# Altium PCB cycloonboard.PcbDoc
Units mil, origin at the board's own origin, x right, y up, seen from the top; angles counter-clockwise.
Board outline 3960 x 4000 mil, 2 copper layers (Top Layer, Bottom Layer), stack 61.756 mil thick; 43 components, 53 nets, 235 pads, 35 vias.
Unrouted connection lines stored in the file: 24.
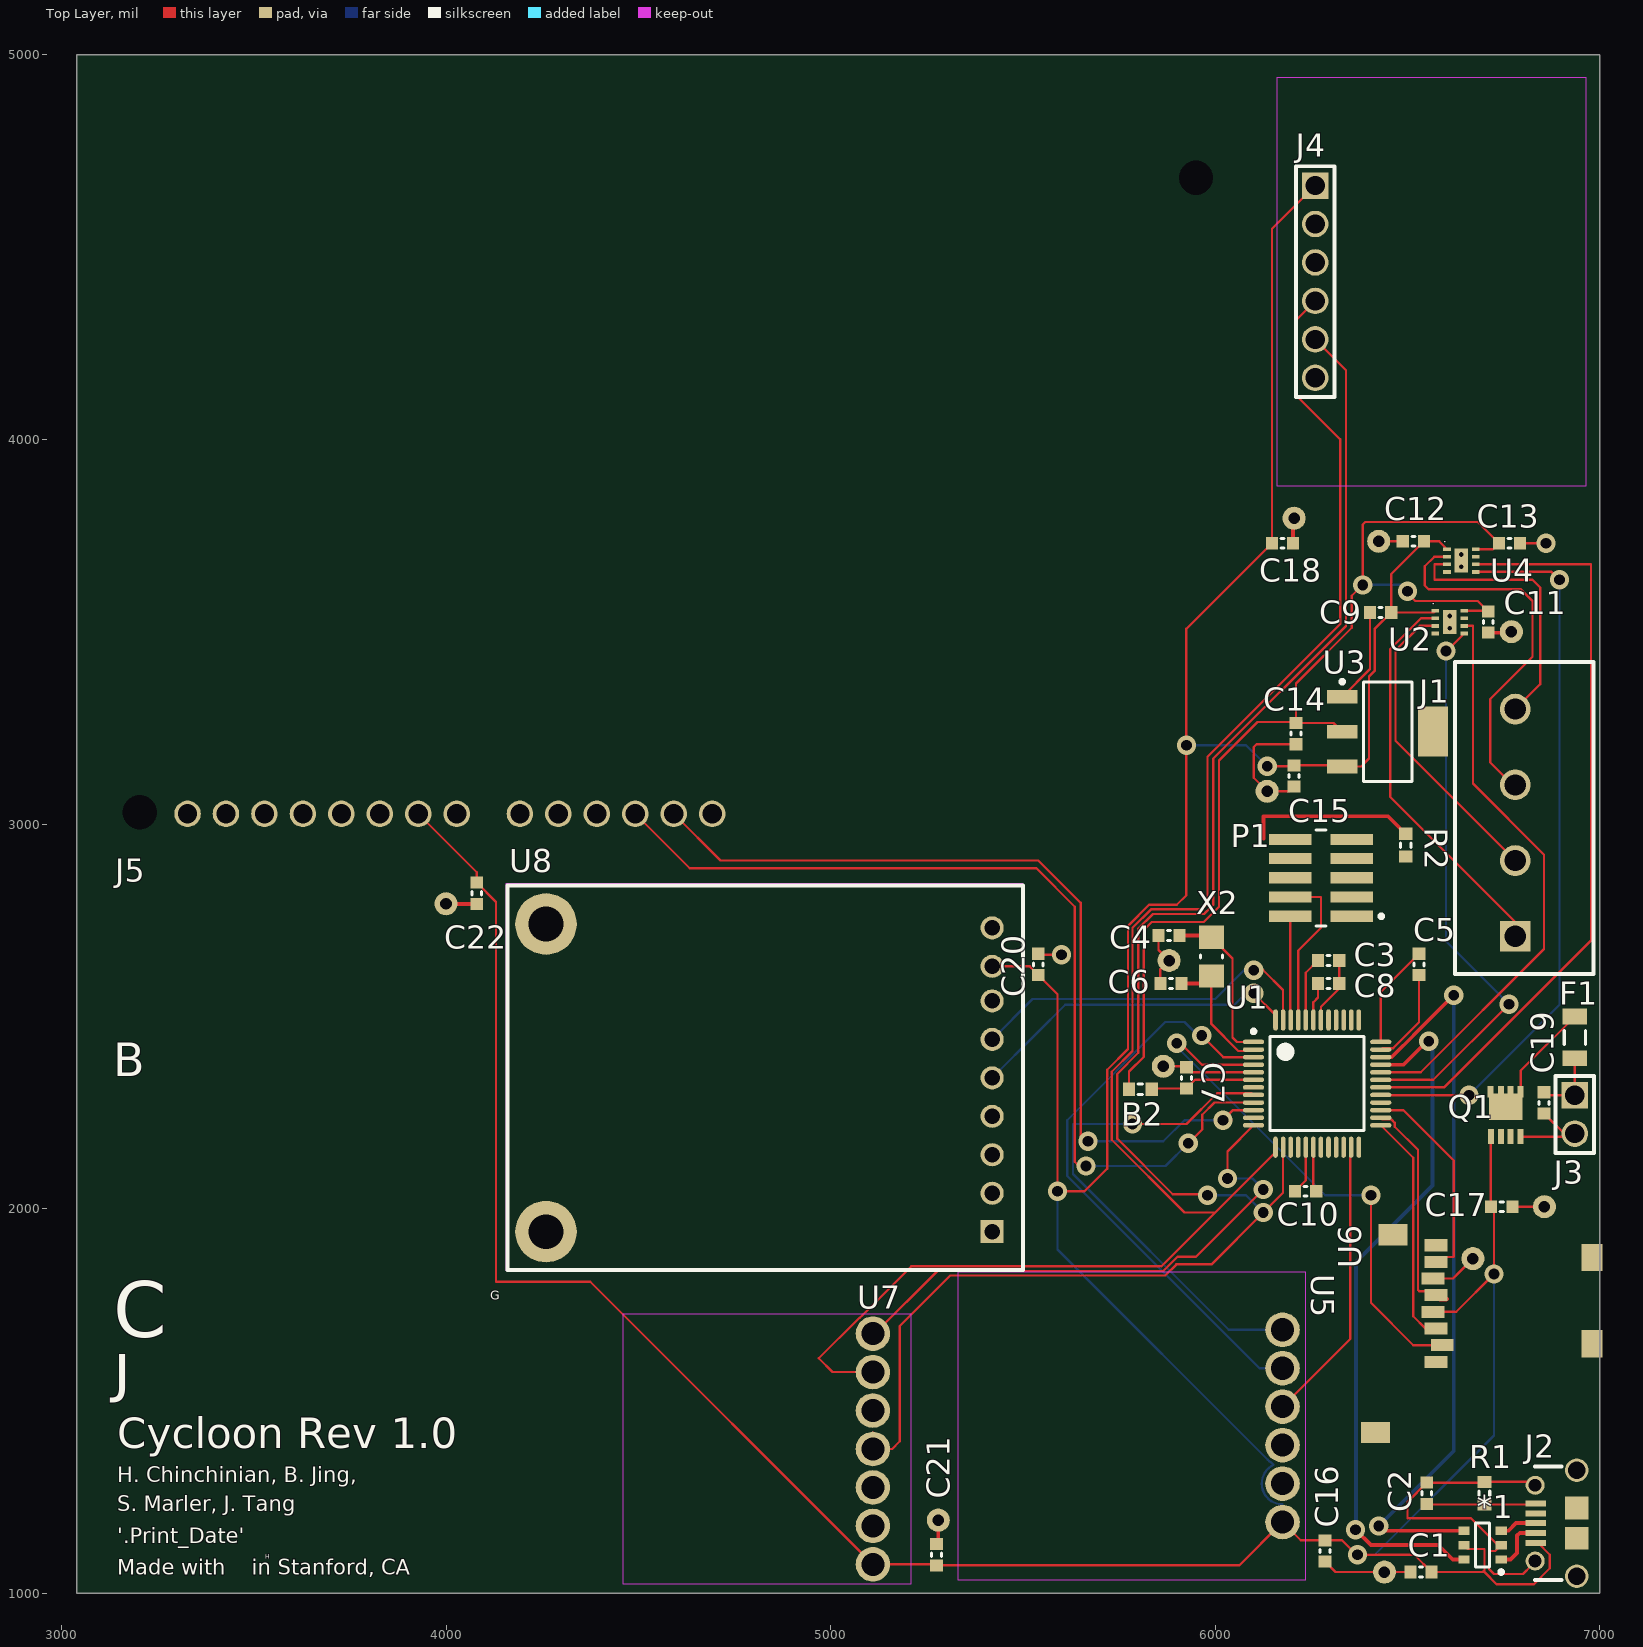
[diagram p0: Top Layer view]
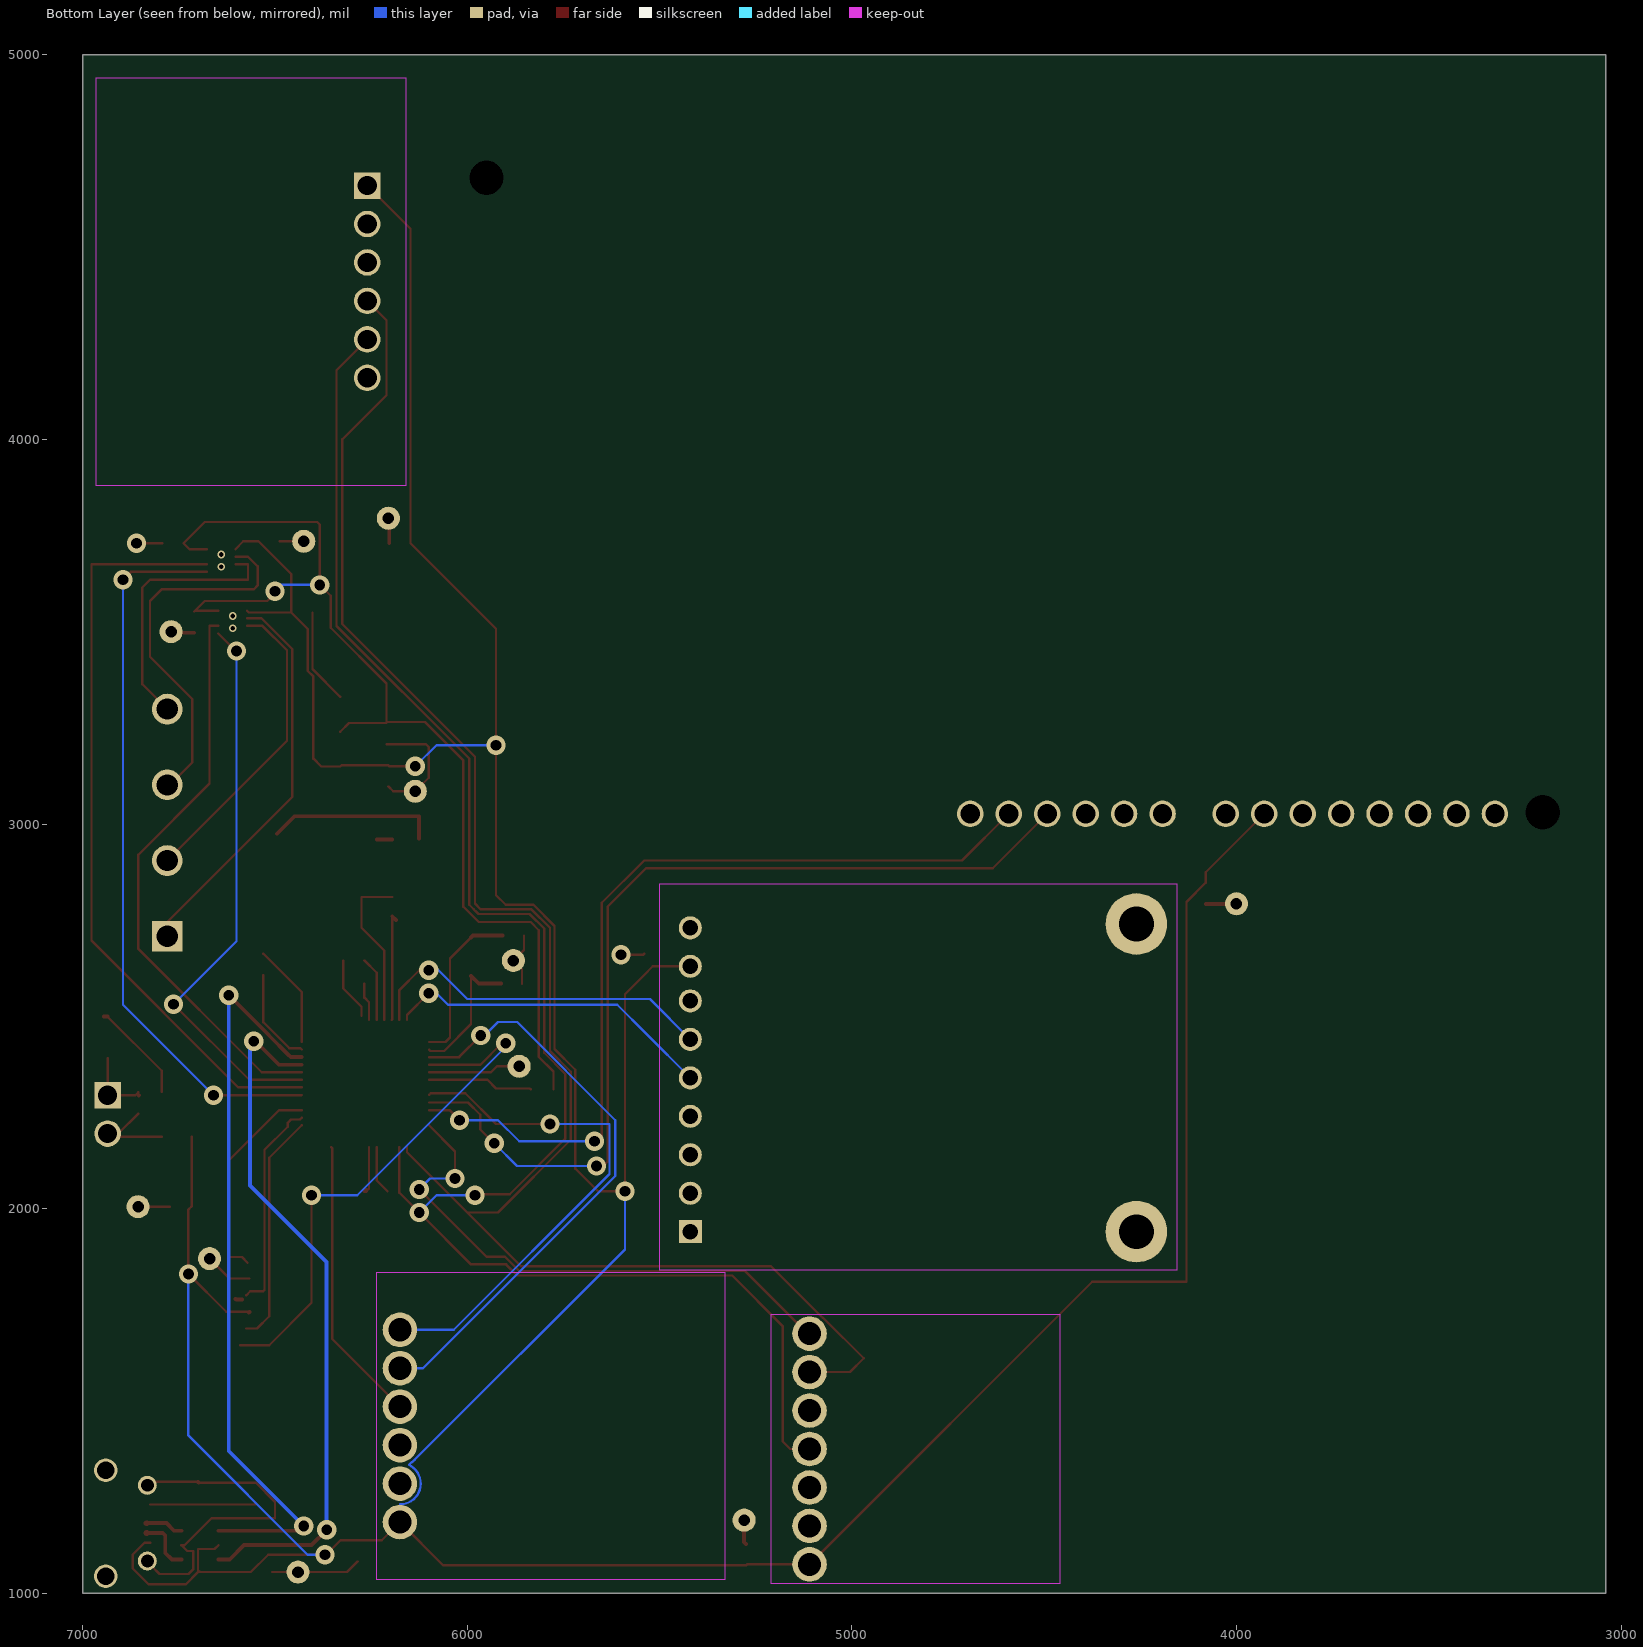
[diagram p1: Bottom Layer view, seen from below]
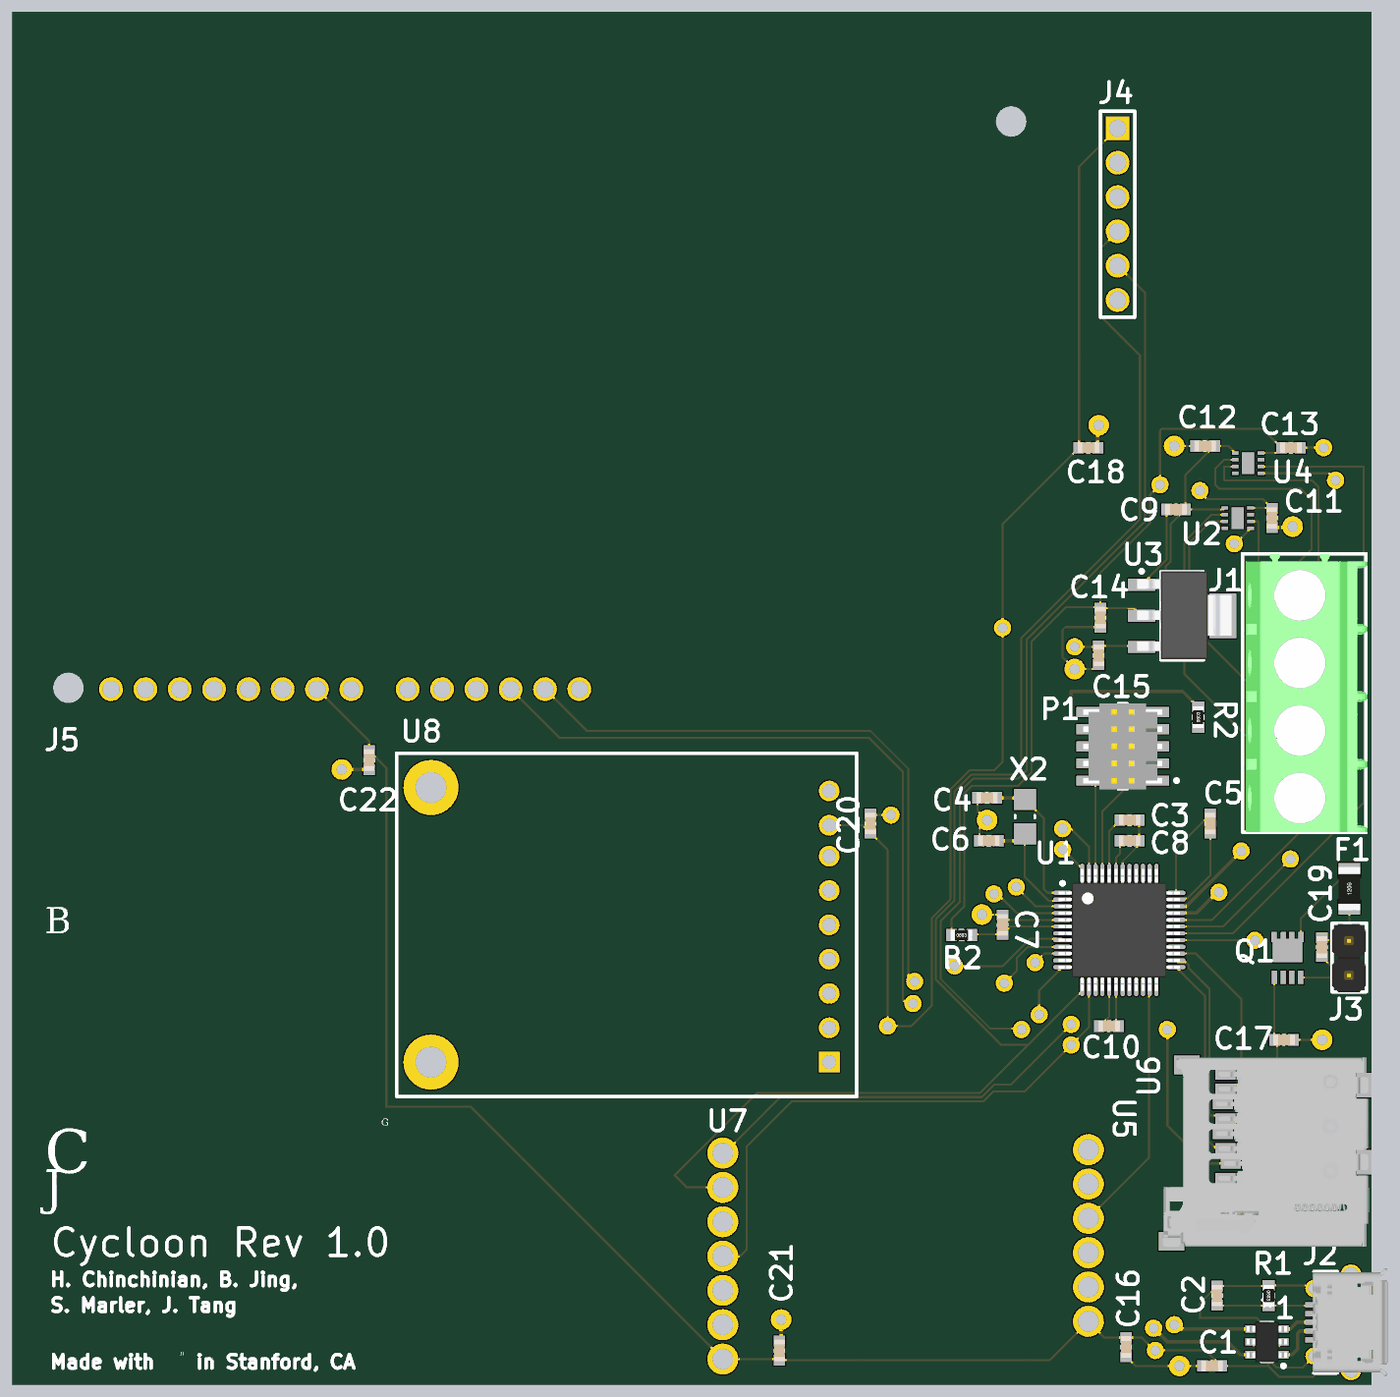
[diagram p2: 3D render of the assembled board from above, using the file's embedded part models]

## Layer stack, top to bottom
Top Solder: solder mask 1, SM-001, Dk 4
Top Layer: signal copper 1.378
Dielectric 1: core 59, Core-043, Dk 4.3
Bottom Layer: signal copper 1.378
Bottom Solder: solder mask 1, SM-001, Dk 4

## Board outline
3040,1000 7000,1000 7000,5000 3040,5000

## Design rules (kind name [scope] priority, off if disabled: settings)
AcuteAngle [All] p1: minimum=4.50000000000000E+0001 checktracksonly=FALSE
BoardOutlineClearance [All] p1: gap=20 ignorepadtopadclearanceinfootprint=FALSE except(0: Arc-SplitContinuation Track-SplitContinuation SMDPad-SplitContinuation THPad-SplitContinuation Via-SplitContinuation Fill-SplitContinuation Poly-SplitContinuation Region-SplitContinuation Text-SplitContinuation)
Clearance [All] p1: gap=6 ignorepadtopadclearanceinfootprint=TRUE except(0: Arc-Hole Track-Hole SMDPad-Hole THPad-Hole Via-Hole Fill-Hole Poly-Hole Region-Hole Text-Hole)
DiffPairsRouting [All] p1: maxlimit=10 minlimit=5 mostfreqgap=10 toplayer_minwidth=5 toplayer_maxwidth=15 toplayer_prefwidth=10 bottomlayer_minwidth=5 bottomlayer_maxwidth=15 bottomlayer_prefwidth=10 maxuncoupledlength=500
HoleSize [All] p1: absolutevalues=TRUE maxlimit=1000 minlimit=12 maxpercent=80.000 minpercent=20.000
MinimumAnnularRing [All] p1: minimumring=6
MinimumSolderMaskSliver [All] p1: minsoldermaskwidth=0
PolygonConnect [All] p1: connectstyle=Relief reliefconductorwidth=10 reliefentries=4 polygonreliefangle="90 Angle" airgapwidth=10
RoutingVias [All] p1: holewidth=12 width=24 viastyle="Through Hole" minholewidth=12 minwidth=24 maxholewidth=1000 maxwidth=1000
SilkToSilkClearance [All] p1: silktosilkclearance=0
SilkToSolderMaskClearance [IsPad] p1: minsilkscreentomaskgap=0 clearancetoexposedcopper=TRUE
SolderMaskExpansion [All] p1: expansion=4 istentingtop=FALSE
UnRoutedNet [All] p1: checkbadconnections=TRUE
Width [All] p1: maxlimit=1000 minlimit=6 preferedwidth=6 minimp=50.000000 maximp=50.000000 favimp=50.000000 checkconnectedcopper=TRUE
24 further rules are at their usual default settings.

## Classes and differential pairs
component class Topsheet: C9 C11 C12 C13 C14 C15 C16 C17 C18 C19 C20 C21 C22 F1 J1 J3 J4 J5 Q1 U2 U3 U4 U5 U6 U7
component class "Arduino Core": *1 B2 C1 C2 C3 C4 C5 C6 C7 C8 C10 J2 P1 R1 R2 U1 X2
differential pair USB: +USB_P -USB_N
differential pair USB_CON: +USB_CON_P -USB_CON_N

## Components (designator, comment, footprint, x,y, rotation, side; value= is the part's Value field where it differs from the comment)
*1 "USBLC6-2" 6SOT23 6695,1125 r180 top
B2 "FB_1608" R0603 5805.47,2310 r0 top
C1 "__template_cap" C0603 6535,1055 r180 top
C2 "__template_cap" C0603 6550,1260 r90 top
C3 "__template_cap" C0603 6295,2645 r180 top
C4 "__template_cap" C0603 5880,2710 r0 top
C5 "__template_cap" C0603 6530,2635 r90 top
C6 "__template_cap" C0603 5885,2585 r0 top
C7 "__template_cap" C0603 5925,2340 r270 top
C8 "__template_cap" C0603 6295,2585 r0 top
C9 "__template_cap" C0603 6430,3550 r180 top
C10 "__template_cap" C0603 6235,2045 r0 top
C11 "__template_cap" C0603 6710,3525 r270 top
C12 "__template_cap" C0603 6515,3735 r180 top
C13 "__template_cap" C0603 6765,3730 r0 top
C14 "__template_cap" C0603 6210,3235 r270 top
C15 "__template_cap" C0603 6205,3125 r270 top
C16 "__template_cap" C0603 6285,1110 r90 top
C17 "__template_cap" C0603 6745,2005 r180 top
C18 "__template_cap" C0603 6175,3730 r180 top
C19 "__template_cap" C0603 6855,2275 r90 top
C20 "__template_cap" C0603 5540,2635 r90 top
C21 "__template_cap" C0603 5275,1100 r270 top
C22 "__template_cap" C0603 4080,2820 r270 top
F1 "__template_fuse" R1206 6935,2445 r90 top
J1 "CONN 1x4 Screw Terminal" CONN_1x4_5mm 6970.94,2609.72 r180 top
J2 "CONN_USB_MICROB_SMD_TH_R/A" CONN_USBMICROB_10118194-0001LF 6940,1182.2 r90 top
J3 "CONN HEADER 2POS VERT T/H" CONN_1x2_100MIL 6935,2295 r0 top
J4 "CONN HEADER 6POS T/H" CONN_1x6_100MIL 6260,4660 r0 top
J5 "ROCKBLOCK_V2" ROCKBLOCK_V2 3107.48,2931.97 r270 top
P1 "FTSH-105-01-F-DV-K" SMTC-FTSH-105-01-L-DV-K_V 6275.12,2860 r90 top
Q1 "Si7615" POWERPAK_1212-8_SINGLE 6755,2231.04 r90 top
R1 "__template_resistor" R0603 6700,1260 r270 top
R2 "__template_resistor" R0603 6495,2945 r90 top
U1 "SAMD21G18A-A" "SAMD21 TQFP-48" 6265,2325 r0 top
U2 "DRV8837CDSGT" 8WSON 6572.6,3515.16 r270 top
U3 "LDO_LD1117S33CTR" 4SOT223 6448.11,3240 r0 top
U4 "DRV8837CDSGT" 8WSON 6602.6,3675.16 r270 top
U5 "MAX31855" ADAFRUIT_THERMOCOUPLE_BREAKOUT 6175,1385 r180 top
U6 "uSD Card" MICROSD_CARD_SOCKET 6424.65,1953.66 r90 top
U7 "BMP280" ADAFRUIT_BMP280_BREAKOUT 5110,1375 r180 top
U8 "Adafruit GPS Module" adafruit_gps_746 5500,1840 r90 top
X2 "XTAL_9HT10-32.768KEZF-T" XTAL_TXC_9HT10 5990,2655 r90 top

## Footprints (in the part's own frame and the unit in brackets; to place one, negate y for a bottom-side part, rotate by r counter-clockwise, add the part's x,y. Pads: shape width x height; smd on the part's side, far side on the other; paste and mask are expansions set on the pad)
4SOT223 [mm] "SOT223, 4-Leads, Body 6.6x7.1mm (max), Pitch 2.30mm, IPC Medium Density"
  rect 2x0.9 smd: 1(-3,2.3) 2(-3,0) 3(-3,-2.3)
  rect 2x3.3 smd: 4(3,0)
  silkscreen extent -3.12,-3.27 1.6,3.42, body extent -3.34,-3.2 3.66,3.3, height 1.59
6SOT23 [mm] "SOT23, 6-Leads, Body 2.9x2.8mm (max), Pitch 0.95mm, IPC High Density"
  rect 0.75x0.55 smd: 1(-1.225,0.95) 2(-1.225,0) 3(-1.225,-0.95) 4(1.225,-0.95) 5(1.225,0) 6(1.225,0.95)
  silkscreen extent -1.35,-1.45 0.45,1.9, body extent -1.5,-1.5 1.5,1.5, height 1.46
8WSON [mm]
  rect 0.25x0.5 smd: 1(-1,0) 2(-0.5,0) 3(0,0) 4(0.5,0) 5(0.5,1.9) 6(0,1.9) 7(-0.5,1.9) 8(-1,1.9)
  rect 1.6x0.9 smd: PAD(-0.25,0.95)
ADAFRUIT_BMP280_BREAKOUT [mil]
  round 90 hole 60: 0(0,300) 1(0,200) 2(0,100) 3(0,0) 4(0,-100) 5(0,-200) 6(0,-300)
adafruit_gps_746 [mil]
  round 160 hole 90: 1(100,1240)
  rect 60x60 hole 40: 1(100,80)
  round 160 hole 90 paste+0: 1(900,1240)
  round 60 hole 40: 2(200,80) 3(300,80) 4(400,80) 5(500,80) 6(600,80) 7(700,80) 8(790,80)
  round 60 hole 40 paste+0: 9(890,80)
  silkscreen extent 0,0 1000,1340
ADAFRUIT_THERMOCOUPLE_BREAKOUT [mil]
  round 90 hole 60: 0(0,200) 1(0,100) 2(0,0) 3(0,-100) 4(0,-200) 5(0,-300)
C0603 [mm] "Chip Capacitor, 2-Leads, Body 1.6x0.8mm, IPC High Density"
  rect 0.8x0.85 smd: 1(-0.7,0) 2(0.7,0)
  silkscreen extent -0.1,-0.33 0.1,0.33, body extent -0.8,-0.4 0.8,0.4, height 0.8
CONN_1x2_100MIL [mm]
  rect 1.75x1.75 hole 1.27: 1(0,0)
  round 1.75 hole 1.27: 2(0,-2.54)
  silkscreen extent -1.27,-3.81 1.27,1.27, body extent -1.3,-3.86 1.24,1.22, height 8.5
CONN_1x4_5mm [mil]
  rect 80x80 hole 55: 1(190.94,-98.42)
  round 80 hole 55: 2(190.94,-295.28) 3(190.94,-492.13) 4(190.94,-688.98)
  silkscreen extent -13,-811 347,0, body extent -17,-811 337,-1, height 449
CONN_1x6_100MIL [mm]
  rect 1.75x1.75 hole 1.27: 1(0,0)
  round 1.75 hole 1.27: 2(0,-2.54) 3(0,-5.08) 4(0,-7.62) 5(0,-10.16) 6(0,-12.7)
  silkscreen extent -1.27,-13.97 1.27,1.27, body extent -1.27,-13.97 1.27,1.27, height 2.54
CONN_USBMICROB_10118194-0001LF [mm]
  rect 0.4x1.35 smd: 1(-1.3,2.7) 2(-0.65,2.7) 3(0,2.7) 4(0.65,2.7) 5(1.3,2.7)
  round 1.55 hole 1.15: SHIELD(-3.5,0) SHIELD(3.5,0)
  round 1.25 hole 0.85: SHIELD(-2.5,2.75) SHIELD(2.5,2.75)
  rect 1.5x1.55 smd: SHIELD(-1,0) SHIELD(1,0)
  silkscreen extent -3.75,1.02 3.75,2.75, body extent -4.02,-2.7 6.75,2.88, height 5.83
MICROSD_CARD_SOCKET [mm]
  rect 0.8x1.5 smd: 1(-8.94,-3.8) 2(-7.84,-4.2) 3(-6.74,-3.8) 4(-5.64,-3.6) 5(-4.54,-3.8) 6(-3.44,-3.6) 7(-2.34,-3.8) 8(-1.24,-3.8)
  rect 1.4x1.9 smd: CD(-13.6,0.2) SHIELD3(-0.55,-0.95)
  rect 1.8x1.4 smd: SHIELD1(-2.05,-14.1) SHIELD2(-7.75,-14.1)
  body extent -14,-14.43 0,0.83, height 1.85
POWERPAK_1212-8_SINGLE [mm] "PowerPAK 1212-8 Single (Vishay footprint)"
  rect 0.99x0.405 smd: 1(-1.12,-0.315) 1(-1.12,0.315) 1(-1.12,0.975) 4(-1.12,-0.975)
  rect 1.725x2.204 smd: 5(0.863,0)
  rect 0.76x0.405 smd: 5(1.855,-0.992) 5(1.855,-0.315) 5(1.855,0.315) 5(1.855,0.992)
  Mechanical 13 keep-out region: -0.168,-1.775 0.167,-1.775 0.167,1.775 -0.168,1.775
  body extent -1.5,-1.25 2,1.25, height 1.05
R0603 [mm] "Chip Resistor, 2-Leads, Body 1.6x0.8mm, IPC High Density"
  rect 0.8x0.9 smd: 1(-0.75,0) 2(0.75,0)
  silkscreen extent -0.15,-0.35 0.15,0.35, body extent -0.8,-0.4 0.8,0.4, height 0.45
R1206 [mm] "Chip Resistor, 2-Leads, Body 3.1x1.6mm, IPC High Density"
  rect 1.05x1.6 smd: 1(-1.375,0) 2(1.375,0)
  silkscreen extent -0.45,-0.7 0.45,0.7, body extent -1.6,-0.8 1.6,0.8, height 0.6
ROCKBLOCK_V2 [mm] "Header for RockBlock V2"
  round 1.75 hole 1.27: 1(-2.4,40.25) 2(-2.4,37.71) 3(-2.4,35.17) 4(-2.4,32.63) 5(-2.4,30.09) 6(-2.4,27.55) 7(-2.4,23.38) 8(-2.4,20.84) 9(-2.4,18.3) 10(-2.4,15.76) 11(-2.4,13.22) 12(-2.4,10.68) 13(-2.4,8.14) 14(-2.4,5.6)
  round 0 hole 2.261 unplated: HOLE(-44.4,72.2) HOLE(-2.5,2.45)
"SAMD21 TQFP-48" [mm] "TQFP-48, Body 7.00x7.00mm, Pitch 0.50mm, IPC Medium Density"
  oval 1.4x0.3 smd: 1(-4.2,2.75) 2(-4.2,2.25) 3(-4.2,1.75) 4(-4.2,1.25) 5(-4.2,0.75) 6(-4.2,0.25) 7(-4.2,-0.25) 8(-4.2,-0.75) 9(-4.2,-1.25) 10(-4.2,-1.75) 11(-4.2,-2.25) 12(-4.2,-2.75) 25(4.2,-2.75) 26(4.2,-2.25) 27(4.2,-1.75) 28(4.2,-1.25) 29(4.2,-0.75) 30(4.2,-0.25) 31(4.2,0.25) 32(4.2,0.75) 33(4.2,1.25) 34(4.2,1.75) 35(4.2,2.25) 36(4.2,2.75)
  oval 0.3x1.4 smd: 13(-2.75,-4.2) 14(-2.25,-4.2) 15(-1.75,-4.2) 16(-1.25,-4.2) 17(-0.75,-4.2) 18(-0.25,-4.2) 19(0.25,-4.2) 20(0.75,-4.2) 21(1.25,-4.2) 22(1.75,-4.2) 23(2.25,-4.2) 24(2.75,-4.2) 37(2.75,4.2) 38(2.25,4.2) 39(1.75,4.2) 40(1.25,4.2) 41(0.75,4.2) 42(0.25,4.2) 43(-0.25,4.2) 44(-0.75,4.2) 45(-1.25,4.2) 46(-1.75,4.2) 47(-2.25,4.2) 48(-2.75,4.2)
  silkscreen extent -4.32,-3.1 3.1,3.57, body extent -4.5,-4.5 4.5,4.5, height 1.2
SMTC-FTSH-105-01-L-DV-K_V [mm] "CONN, 10-Leads, Body 6.35x3.43mm, Pitch 1.27mm"
  rect 0.74x2.79 smd: 1(-2.54,-2.035) 2(-2.54,2.035) 3(-1.27,-2.035) 4(-1.27,2.035) 5(0,-2.035) 6(0,2.035) 7(1.27,-2.035) 8(1.27,2.035) 9(2.54,-2.035) 10(2.54,2.035)
  silkscreen extent -3.17,-4.11 3.17,0.34, body extent -3.17,-2.92 3.18,2.92, height 6.12
XTAL_TXC_9HT10 [mm] "Chip Capacitor, 2-Leads, Body 3.2x1.5mm, IPC Medium Density"
  rect 1.55x1.65 smd: 1(-1.275,0) 2(1.275,0)
  silkscreen extent -0.1,-0.72 0.1,0.72, body extent -1.65,-0.8 1.65,0.8, height 0.85

## Part data
*1: Capacitance @ Frequency=-, Current - Peak Pulse (10/1000µs)="5A (8/20µs)", Manufacturer=STMicroelectronics, Manufacturer Part Number=USBLC6-2SC6, Operating Temperature="-40°C ~ 125°C (TJ)", Package / Case=SOT-23-6, Power Line Protection=Yes, Supplier Part Number 1=497-5235-1-ND, Voltage - Breakdown (Min)=6V, Voltage - Clamping (Max) @ Ipp=17V, Voltage - Reverse Standoff (Typ)=5.25V, Applications=Ethernet, Bidirectional Channels=-, Category="Circuit Protection", ComponentLink1Description=http://www.st.com/web/en/resource/technical/document/datasheet/CD00050750.pdf, ComponentLink1URL=http://www.st.com/web/en/resource/technical/document/datasheet/CD00050750.pdf, Mounting Type="Surface Mount", Packaging="Cut Tape (CT)", Part Status=Active, Power - Peak Pulse=-, Pricing 1="1=0.51, 10=0.411, 100=0.2802, 500=0.21012, 1000=0.15759 (USD)", RoHS="RoHS Compliant", Stock 1=31719, Supplier 1=Digi-Key, Supplier Device Package=SOT-23-6, Type="Steering (Rail to Rail)", Unidirectional Channels=2
B2: "FERRITE BEAD 600 OHM 300mA", Current Rating (Max)=300mA, DC Resistance (DCR) (Max)="400 mOhm", Impedance @ Frequency="600 Ohm @ 100MHz", Manufacturer="Taiyo Yuden", Manufacturer Part Number=BK1608HW601-T, Operating Temperature="-55°C ~ 125°C", Package / Case="0603 (1608 Metric)", Ratings=-, Supplier Part Number 1=587-1879-1-ND, Category=Filters, ComponentLink1Description=http://ds.yuden.co.jp/TYCOMPAS/ut/detail.do?productNo=BK1608HW601-T&fileName=BK1608HW601-T_SS&mode=specSheetDownload, ComponentLink1URL=http://ds.yuden.co.jp/TYCOMPAS/ut/detail.do?productNo=BK1608HW601-T&fileName=BK1608HW601-T_SS&mode=specSheetDownload, Filter Type=-, Height (Max)="0.037\" (0.95mm)", Mounting Type="Surface Mount", Number of Lines=1, Packaging="Cut Tape (CT)", Part Status=Active, Pricing 1="1=0.1, 10=0.059, 50=0.0474, 100=0.0426, 250=0.0312, 500=0.0227, 1000=0.02223 (USD)", RoHS="RoHS Compliant", Size / Dimension="0.063\" L x 0.031\" W (1.60mm x 0.80mm)", Stock 1=11908, Supplier 1=Digi-Key
C1 C3 C5 C7 C10: library part 490-1519-1-ND, "CAP CER 0603 0.1µF X7R 50V 10%", Capacitance (shorthand)=0.1µF, Capacitance - pF (Machine readable)=#NAME?, Dielectric=X7R, Manufacturer="Murata Electronics North America", Rated Voltage=50V, Supplier 1=Digikey, Supplier Part Number 1=490-1519-1-ND, Type=capacitor
C2: library part 490-1506-1-ND, "CAP CER 0603 4700pF X7R 50V 10%", Capacitance (shorthand)=4700pF, Capacitance - pF (Machine readable)=#NAME?, Dielectric=X7R, Manufacturer="Murata Electronics North America", Rated Voltage=50V, Supplier 1=Digikey, Supplier Part Number 1=490-1506-1-ND, Type=capacitor
C4 C6: library part 490-1407-1-ND, "CAP CER 15PF 50V C0G/NP0 0603", Capacitance (shorthand)=15pF, Capacitance - pF (Machine readable)=15, Dielectric="C0G, NP0", Manufacturer="Murata Electronics North America", Rated Voltage=50V, Supplier 1=Digikey, Supplier Part Number 1=490-1407-1-ND, Type=capacitor
C8: library part 490-3900-1-ND, "CAP CER 0603 1µF X7R 16V 10%", Capacitance (shorthand)=1µF, Capacitance - pF (Machine readable)=#NAME?, Dielectric=X7R, Manufacturer="Murata Electronics North America", Rated Voltage=16V, Supplier 1=Digikey, Supplier Part Number 1=490-3900-1-ND, Type=capacitor
C9 C11 C12 C13 C14 C15: library part 490-13248-1-ND, "CAP CER 10UF 35V X5R 0603 20%", Capacitance (shorthand)=10µF, Capacitance - pF (Machine readable)=#NAME?, Dielectric=X5R, Manufacturer="Murata Electronics North America", Rated Voltage=35V, Supplier 1=Digikey, Supplier Part Number 1=490-13248-1-ND, Type=capacitor
F1: library part CMP-035-0003-1, Design Item ID=__template_fuse, Source=fuse.SchLib
J1: library part CONN_1x4_PhoenixContact_1935187, "CONN 1x4 Screw Terminal: Phoenix Contact 1935187", Supplier Part Number 1=277-1579-ND, ComponentLink1Description="Digikey part", ComponentLink1URL=https://www.digikey.com/product-detail/en/phoenix-contact/1935187/277-1579-ND/568616, Supplier 1=Digi-Key
J2: "CONN RCPT USB2.0 MICRO B SMD R/A", Colour=Black, Current Rating=1.8A, Flammability Rating="UL94 V-0", Insulation Resistance=1GR, Manufacturer="Amphenol FCI", Manufacturer Part Number=10118194-0001LF, Max Operating Temperature=85°C, Max Voltage Rating (AC)=100V, Min Operating Temperature=-55°C, Package Quantity=9600, Supplier Part Number 1=609-4618-1-ND, ComponentLink1Description=https://datasheet.ciiva.com/851/10118194-851110.pdf, ComponentLink1URL=https://datasheet.ciiva.com/851/10118194-851110.pdf, ComponentLink2Description=https://datasheet.ciiva.com/851/10118194-851111.pdf, ComponentLink2URL=https://datasheet.ciiva.com/851/10118194-851111.pdf, ComponentLink3Description=https://datasheet.ciiva.com/4598/10118194ac-197217-4598807.pdf, ComponentLink3URL=https://datasheet.ciiva.com/4598/10118194ac-197217-4598807.pdf, ComponentLink4Description=https://datasheet.ciiva.com/29907/10118194-29907230.pdf, ComponentLink4URL=https://datasheet.ciiva.com/29907/10118194-29907230.pdf, ComponentLink5Description=https://datasheet.ciiva.com/26945/getdatasheetpartid-418619-26945695.pdf, ComponentLink5URL=https://datasheet.ciiva.com/26945/getdatasheetpartid-418619-26945695.pdf, Connector Type=USB,Receptacle, Contact Material="Copper Alloy", Contact Plating=Nickel,Gold, Depth=5mm, Gender=Receptacle, Housing Material=Polymer, Lead Free="Lead Free", Length=8.05mm, Mount="Surface Mount,Horizontal", Number of Contacts=5, Number of Ports=1, Number of Terminals=5, Orientation="Right Angle", Packaging="Tape and Reel", Pitch=0.65mm, Pricing 1="1=0.46, 10=0.437, 25=0.3744, 50=0.318, 100=0.3056, 250=0.2744, 500=0.262 (USD)", Radiation Hardening=No, Stock 1=180464, Supplier 1=Digi-Key, Termination=Solder
J3: library part CONN_1x2, Color=Black, Manufacturer=FCI, Manufacturer Part Number=77311-118-02LF, Category="Connectors, Interconnects", ComponentLink1Description=http://portal.fciconnect.com/res/en/pdffiles/doc_search//77311.pdf, ComponentLink1URL=http://portal.fciconnect.com/res/en/pdffiles/doc_search//77311.pdf, Connector Type="Header, Unshrouded", Contact Finish="Gold, GXT™", Contact Finish Thickness="30µin (0.76µm)", Contact Mating Length="0.230\" (5.84mm)", Contact Type="Male Pin", Fastening Type=-, Features=-, Mounting Type="Through Hole", Number of Positions=2, Number of Positions Loaded=All, Number of Rows=1, Packaging=Bulk, Pitch="0.100\" (2.54mm)", RoHS="RoHS Compliant", Row Spacing=-, Termination=Solder
J4: library part CONN_1x6
J5: "CHILD OF SATAN, SOURCE OF BOTH TREMENDOUS FORTUNE AND UNSPEAKABLE ANGUISH", ComponentLink1Description="Developer's Guide", ComponentLink1URL=https://www.rock7.com/downloads/RockBLOCK-Developer-Guide-Mk2.pdf
P1: library part CMP-2000-05352-1, "Male Header, Pitch 1.27 mm, 2 x 5 Position, Height 6.12 mm, RoHS, Tube", Color=Black, Manufacturer=Samtec, Package Description="Male Header, Pitch 1.27 mm, 2 x 5 Position, Height 5.97 mm, Tail Length 4.32 mm", Package Reference=FTSH-105-01-L-DV-K, Category=Connectors,Interconnects, Connector Type=Header,Shrouded, Contact Finish=Gold, Contact Finish Thickness=3µin(0.08µm), Contact Mating Length="0.120\"(3.05mm)", Contact Type=MalePin, Datasheet URL=http://suddendocs.samtec.com/prints/ftsh-1xx-xx-xxx-dv-xxx-mkt.pdf, Datasheet Version="Rev. ET, 10/1995", Family=RectangularConnectors-Headers,MalePins, Fastening Type=-, Features=-, Manufacturer URL=http://www.samtec.com/, Mounting Type=SurfaceMount, Number of Positions=10, Number of Positions Loaded=All, Number of Rows=2, Package URL=http://suddendocs.samtec.com/prints/ftsh-1xx-xx-xxx-dv-xxx-footprint.pdf, Packaging=Tube, Pitch="0.050\"(1.27mm)", Row Spacing="0.050\"(1.27mm)", Series=FTSH, Termination=Solder
Q1: library part PFET_SI7615ADN-T1, "MOSFET P-CH 20V 35A PPK", Current - Continuous Drain (Id) @ 25°C="35A (Tc)", Drain to Source Voltage (Vdss)=20V, Input Capacitance (Ciss) @ Vds="5590pF @ 10V", Manufacturer="Vishay Siliconix", Manufacturer Part Number=SI7615ADN-T1-GE3, Operating Temperature="-55°C ~ 150°C (TJ)", Package / Case="PowerPAK® 1212-8", Power - Max=52W, Supplier Part Number 1=SI7615ADN-T1-GE3CT-ND, Category="Discrete Semiconductor Products", ComponentLink1Description=http://www.vishay.com/docs/62667/si7615adn.pdf, ComponentLink1URL=http://www.vishay.com/docs/62667/si7615adn.pdf, FET Feature=Standard, FET Type="MOSFET P-Channel, Metal Oxide", Gate Charge (Qg) @ Vgs="183nC @ 10V", Mounting Type="Surface Mount", Packaging="Cut Tape (CT)", Part Status=Active, Pricing 1="1=0.73, 10=0.646, 25=0.6068, 100=0.4951, 250=0.45988, 500=0.3914, 1000=0.31312 (USD)", Rds On (Max) @ Id, Vgs="4.4 mOhm @ 20A, 10V", RoHS="RoHS Compliant", Stock 1=98451, Supplier 1=Digi-Key, Supplier Device Package="PowerPAK® 1212-8", Vgs(th) (Max) @ Id="1.5V @ 250µA"
R1: library part 311-1.00MHRCT-ND, "RES SMD 1M OHM 1% 1/10W 0603", Manufacturer=Yageo, Manufacturer Part Number=RC0603FR-071ML, Operating Temperature="-55°C ~ 155°C", Power (Watts)="0.1W, 1/10W", Resistance="1 MΩ", Resistance (Sortable)=1000000, Temperature Coefficient=±100ppm/°C, Tolerance=±1%, Datasheets=http://www.yageo.com/documents/recent/PYu-RC_Group_51_RoHS_L_9.pdf, Image=//media.digikey.com/Renders/Yageo%20Renders/0603-(1608-Metric).jpg, Supplier 1=Digikey, Supplier Part Number 1=311-1.00MHRCT-ND
R2: library part 311-10.0KHRCT-ND, "RES SMD 10K OHM 1% 1/10W 0603", Manufacturer=Yageo, Manufacturer Part Number=RC0603FR-0710KL, Operating Temperature="-55°C ~ 155°C", Power (Watts)="0.1W, 1/10W", Resistance="10 kΩ", Resistance (Sortable)=10000, Temperature Coefficient=±100ppm/°C, Tolerance=±1%, Datasheets=http://www.yageo.com/documents/recent/PYu-RC_Group_51_RoHS_L_9.pdf, Image=//media.digikey.com/Renders/Yageo%20Renders/0603-(1608-Metric).jpg, Supplier 1=Digikey, Supplier Part Number 1=311-10.0KHRCT-ND
U1: "48Mhz Atmel SAM ARM Cortex M0+", Supplier Part Number 1=ATSAMD21G18A-AU-ND, ComponentLink1Description="Product Page", ComponentLink1URL=https://www.microchip.com/wwwproducts/en/ATSAMD21G18, ComponentLink2Description=Datasheet, ComponentLink2URL=http://ww1.microchip.com/downloads/en/DeviceDoc/SAM-D21-Family-Datasheet-DS40001882C.pdf, Supplier 1=Digi-Key
U2 U4: library part MOTOR_HBRIDGE_DRV8837C, "MOTOR DRIVER 1A", Current - Output / Channel=-, Current - Peak Output=1A, Manufacturer="Texas Instruments", Operating Temperature="-40°C ~ 150°C (TJ)", Package / Case="8-WFDFN Exposed Pad", Supplier Device Package="8-WSON (2x2)", Supplier Part Number 1=296-44747-1-ND, Voltage - Load="0 V ~ 11 V", Voltage - Supply="1.8 V ~ 7 V", Applications="DC Motors, Solenoids", Category="Integrated Circuits (ICs)", ComponentLink1Description=http://www.ti.com/lit/ds/symlink/drv8837c.pdf, ComponentLink1URL=http://www.ti.com/lit/ds/symlink/drv8837c.pdf, Fault Protection="Current Limiting, Over Temperature, Short Circuit, UVLO", Features=-, Interface=PWM, Load Type=Inductive, Manufacturer Part Number=DRV8837CDSGT, Mounting Type="Surface Mount", Output Configuration="Half Bridge (2)", Packaging="Cut Tape (CT)", Part Status=Active, Pricing 1="1=1.28, 10=1.146, 100=0.8931 (USD)", Rds On (Typ)="1 Ohm LS + HS", RoHS="RoHS Compliant", Stock 1=1424, Supplier 1=Digi-Key, Technology=NMOS
U3: "IC VOLTAGE REG 3.3V 800MA SOT223 INDUSTRIAL TEMP", Current - Limit (Min)=-, Current - Output=800mA, Manufacturer=STMicroelectronics, Manufacturer Part Number=LD1117S33CTR, Operating Temperature="-40°C ~ 125°C", Package / Case="TO-261-4, TO-261AA", Supplier Device Package=SOT-223, Supplier Part Number 1=497-1241-1-ND, Voltage - Dropout (Typical)="1.1V @ 800mA", Voltage - Input="Up to 15V", Voltage - Output=3.3V, Category="Integrated Circuits (ICs)", ComponentLink1Description=http://www.st.com/content/ccc/resource/technical/document/datasheet/99/3b/7d/91/91/51/4b/be/CD00000544.pdf/files/CD00000544.pdf/jcr:content/translations/en.CD00000544.pdf, ComponentLink1URL=http://www.st.com/content/ccc/resource/technical/document/datasheet/99/3b/7d/91/91/51/4b/be/CD00000544.pdf/files/CD00000544.pdf/jcr:content/translations/en.CD00000544.pdf, Mounting Type="Surface Mount", Number of Regulators=1, Packaging="Cut Tape (CT)", Part Status=Active, Pricing 1="1=0.46, 10=0.373, 100=0.2538, 500=0.19034, 1000=0.14276 (USD)", Regulator Topology="Positive Fixed", RoHS="RoHS Compliant", Stock 1=63873, Supplier 1=Digi-Key
U5: library part ADAFRUIT_THERMOCOUPLE_BREAKOUT
U6: library part MICRO_SD_CARD_HOLDER, "MICROSD CARD HOLDER, PUSH-PUSH", Manufacturer=3M, Manufacturer Part Number=2908-05WB-MG, Supplier Part Number 1=3M5607CT-ND, Card Type="Secure Digital - microSD™", Category="Connectors, Interconnects", ComponentLink1Description=http://multimedia.3m.com/mws/media/416257O/3mtm-card-connector-microsdtm-2900-series-ts2197.pdf, ComponentLink1URL=http://multimedia.3m.com/mws/media/416257O/3mtm-card-connector-microsdtm-2900-series-ts2197.pdf, Connector Type="Connector and Ejector", Contact Finish=Gold, Contact Finish Thickness="15µin (0.38µm)", Ejector Side=-, Features=Switch, Height Above Board="0.073\" (1.85mm)", Insertion, Removal Method="Push In, Push Out", Mounting Feature="Normal, Standard - Top", Mounting Type="Surface Mount, Right Angle", Number of Positions="10 (8 + 2)", Packaging="Cut Tape (CT)", Pricing 1="1=3.6, 10=3.458, 25=3.1704, 50=3.0262, 100=2.882, 250=2.52176, 500=2.4497, 1000=2.08945 (USD)", RoHS="RoHS Compliant", Stock 1=32313, Supplier 1=Digi-Key
U7: library part ADAFRUIT_BMP280_BREAKOUT
U8: library part ADAFRUIT_GPS_746, "https://www.adafruit.com/product/746", Supplier Part Number 1=1528-1153-ND, ComponentLink1Description="Adafruit GPS Module", ComponentLink1URL=https://www.adafruit.com/product/746, Supplier 1=Digi-Key
X2: "CRYSTAL 32.768 KHZ 12.5 PF SMD", ESR (Equivalent Series Resistance)="70 kOhm", Frequency=32.768kHz, Frequency Stability=-, Frequency Tolerance=±10ppm, Load Capacitance=12.5pF, Manufacturer="TXC CORPORATION", Manufacturer Part Number=9HT10-32.768KEZF-T, Operating Mode=Fundamental, Operating Temperature="-40°C ~ 85°C", Package / Case=2-SMD, Supplier Part Number 1=887-1507-1-ND, Category="Crystals and Oscillators", ComponentLink1Description=Datasheet, ComponentLink1URL=http://www.txccrystal.com/images/pdf/9ht10.pdf, Height="0.033\" (0.85mm)", Mounting Type="Surface Mount", Packaging="Cut Tape (CT)", Pricing 1="1=1.88, 10=1.625, 50=1.425, 100=1.125, 500=0.95, 1000=0.75 (USD)", Ratings=-, RoHS="RoHS Compliant", Size / Dimension="0.126\" L x 0.059\" W (3.20mm x 1.50mm)", Stock 1=5250, Supplier 1=Digi-Key, Type="kHz Crystal (Tuning Fork)"

## Free pads (board coordinates)
  round 60 hole 30: 17(4000,2792.56) 18(6855.87,2005) 23(6440,1055) 26(6135,3085) 28(6770,3500) 33(6425,3735) 38(5865,2370) 39(5880,2645) 44(6670,1870) 47(6205,3795) 50(5280,1190)

## Via types
v1: diameter 50, hole 28, Top Layer to Bottom Layer, 31 vias
v2: diameter 19.68, hole 11.81, Top Layer to Bottom Layer, 4 vias

## Nets (pads, with @x,y where several pads share a name; then routed paths per layer and width w, separated by ;. In a path a pad name is that pad's centre, name@x,y a point inside that pad or via, vN(x,y) a via of type N, cw(c..) or ccw(c..) an arc to the next point about the centre after c; other vN are vias at no path point)
AGND: C1.2 C2.1 C3.1 C4.1 C5.1 C6.1 C7.1 C8.2 C9.2 C10.2 C11.2 C12.2 C13.2 C14.2 C15.2 C16.1 C17.1 C18.1 C19.1 C20.2 C21.1 C22.2 J2.5 J3.2 J4.3 J5.6 P1.3 P1.5 P1.9 pad.17 pad.18 pad.23 pad.26 pad.28 pad.33 pad.38 pad.39 pad.44 pad.47 pad.50 Q1.4 R1.2 U1.5 U1.18 U1.35 U1.42 U2.4 U2.PAD U3.1 U4.4 U4.PAD U5.2 U6.6 U7.2 U8.7 | length 2945.3
  Top Layer w6: C20.2 5542.56,2660 v1(5600,2660) ; C4.1 5852.44,2672.56 pad.39 5857.44,2622.44 C6.1 ; pad.38 5922.56,2370 C7.1 5938.03,2354.53 U1.5 ; C15.2 6192.56,3085 pad.26 6100,3120 6100,3200 6107.44,3207.44 C14.2 ; U1.18 6255.16,2052.4 C10.2 ; U1.42@6274.84,2500.66 6274.84,2524.84 6322.56,2572.56 C8.2 C3.1 ; C16.1 6312.44,1055 pad.23 C1.2 ; U3.1 6402.44,3402.99 C9.2 ; U1.35 6434.02,2417.25 6462.75,2417.25 6502,2456.5 6502,2456.8 6530,2484.8 C5.1 ; pad.33@6435,3735 pad.33 C12.2 ; C2.1 6551.97,1230.47 R1.2 J2.5@6824.41,1230.47 ; U6.6 6618.23,1818.23 pad.44 ; C17.1 pad.18 ; C13.2 v1(6860,3730) ; Q1.4 6926.95,2186.95 J3.2 6907.44,2195 C19.1
  Top Layer w10: pad.17 4000.12,2792.44 C22.2 ; C21.1 5280,1132.56 pad.50 ; C18.1 6202.56,3792.56 pad.47 ; C10.2 6262.56,2049.17 6266.73,2045 C10.2@6267.56,2045 ; C11.2 6767.44,3497.44 pad.28 pad.28@6770,3490
  other v2: 6610,3509.25 6610,3540.75 6640,3669.25 6640,3700.75
AVDD: B2.2 C7.2 U1.6 | length 274.9
  Top Layer w6: B2.2 5837.44,2312.44 C7.2 5947.4,2334.84 U1.6
BMP_CS: U1.12 U7.6 | length 1454.7
  Top Layer w6: U7.6 5115,1675 5278,1838 5864.97,1838 5901.97,1875 5950,1875 v1(6125,2050) ; v1(6031.72,2078.28) 6031.72,2148.8 U1.12
  Top Layer w10: v1(6031.72,2078.28) v1@6035,2078.28
  Bottom Layer w6: v1(6031.72,2078.28) 6096.72,2078.28 v1(6125,2050)
  Bottom Layer w10: v1(6031.72,2078.28) v1@6038.43,2085
MISO_SD: U1.27 U6.7 | length 549.8
  Top Layer w6: U1.27 6488.9,2256.1 6620,2125 6620,1874 6585.85,1874 U6.7@6571.23,1859.38
MOSI_SD: U1.25 U6.3 | length 604.2
  Top Layer w6: U1.25 6515,2132.09 6515,1720 6546.69,1688.31 U6.3
MOTOR1_1: J1.1 U2.2 | length 1032.1
  Top Layer w6: U2.2 6534.84,3534.84 6455,3455 6455,3070 6780,2745 J1.1
MOTOR1_2: J1.2 U2.3 | length 806
  Top Layer w6: U2.3 6532.13,3515.16 6468.49,3451.51 6468.49,3216.51 J1.2
MOTOR2_1: J1.3 U4.2 | length 969.1
  Top Layer w6: U4.2 6569.84,3694.84 6545,3670 6545,3620 6555,3610 6795,3610 6825,3580 6825,3435 6715,3325 6715,3160 6773.15,3101.85 J1.3
MOTOR2_2: J1.4 U4.3 | length 699.2
  Top Layer w6: U4.3 6570.16,3675.16 6570,3675 6570,3635 6825,3635 6845,3615 6845,3363.7 J1.4
MOTOR_IN_1_1: U1.32 U2.6 | length 1496.7
  Top Layer w6: U1.32 6534.53,2354.53 6855,2675 6855,2920 6670,3105 6670,3515 6669.84,3515.16 U2.6
MOTOR_IN_1_2: U1.31 U2.5 | length 1492
  Top Layer w6: U1.31 6566.76,2334.84 v1(6763.46,2531.54) ; v1(6600,3450) 6601.93,3450 U2.5
  Top Layer w10: v1@6600,3440 v1(6600,3450)
  Bottom Layer w6: v1(6600,3450) 6600,2695 v1(6763.46,2531.54)
  Bottom Layer w10: v1@6750,2530 6763.46,2530 v1(6763.46,2531.54)
MOTOR_IN_2_1: U1.30 U4.6 | length 1982.6
  Top Layer w6: U1.30 6595.16,2315.16 6977,2697 6977,3675.16 U4.6
MOTOR_IN_2_2: U1.29 U4.5 | length 1893.3
  Top Layer w6: U1.29 6430.83,2295 v1(6660,2295) ; U4.5 6874.53,3655.47 v1(6895,3635)
  Bottom Layer w6: v1(6660,2295) 6895,2530 v1(6895,3635)
Net*1_2: *1.2 C2.2 J2.SHIELD R1.1 | length 895.3
  Top Layer w6: R1.1@6698.03,1287.56 C2.2 6500,1237.56 6500,1195 6665,1195 6735,1125 *1.2 6728.23,1110 6712,1110 6712,1063 6725,1050 6800,1050 6821.57,1071.57 J2.SHIELD@6831.73,1071.57 ; R1.1 6810.63,1289.53 J2.SHIELD@6831.73,1268.43
  Top Layer w10: R1.1@6698.03,1287.56 R1.1
NetC4_2: C4.2 U1.1 X2.2 | length 426.9
  Top Layer w6: X2.2 6045,2650.2 6045,2445 6056.73,2433.27 U1.1
  Top Layer w10: C4.2 5985.2,2710 X2.2
NetC6_2: C6.2 U1.2 X2.1 | length 350.6
  Top Layer w6: X2.1 5990,2480 6060,2410 6096.06,2410 U1.2
  Top Layer w10: C6.2 5970.2,2585 X2.1
NetF1_2: F1.2 Q1.5 | length 263.4
  Top Layer w6: Q1.5@6794.06,2304.07 6794.06,2358.19 F1.2
  Top Layer w10: F1.2 F1.2@6945,2499.13
NetU1_11: U1.11
NetU1_15: U1.15
NetU1_16: U1.16
NetU1_19: U1.19
NetU1_20: U1.20
NetU1_21: U1.21
NetU1_22: U1.22
NetU1_24: U1.24
NetU1_28: U1.28
NetU1_37: U1.37
NetU1_38: U1.38
NetU1_39: U1.39
NetU1_41: U1.41
RST: P1.10 R2.1 U1.40 | length 40.4
  Top Layer w10: P1.10 P1.10@6235.35,2960
RXB: J5.2 U1.10 | length 2277.3
  Top Layer w6: J5.2 4713.58,2905 5540,2905 5650,2795 5650,2175 v1(5669,2175) ; v1(6020,2230) 6046.1,2256.1 U1.10
  Top Layer w10: v1(6020,2230) v1@6040,2230
  Bottom Layer w6: v1(5669,2175) 5865,2175 5920,2230 v1(6020,2230)
  Bottom Layer w10: v1@5669,2174.64 v1(5669,2175)
RXG: U1.48 U8.5 | length 864.3
  Top Layer w6: v1(6100,2560) 6156.73,2503.27 U1.48
  Bottom Layer w6: U8.5 5535,2455 5610,2530 6050,2530 6080,2560 v1(6100,2560)
SCK: J4.5 U1.14 U7.3 | length 4571.5
  Top Layer w6: U7.3 5160,1375 5180,1395 5180,1695 5311,1826 5869.94,1826 5898.94,1855 5990,1855 v1(6125,1990) 6176.42,2041.42 U1.14 ; v1(5980,2035) 5977.5,2037.5 5889.47,2037.5 5745,2181.97 5745,2350 5800,2405 5800,2728.03 5837.99,2766.02 5971.02,2766.02 5976.03,2771.03 5976.11,2771.03 5983.14,2778.06 5983.14,2778.14 5995,2790 5995,3170 6340,3515 6340,4180 J4.5
  Top Layer w10: U7.3 U7.3@5110,1415
  Bottom Layer w6: v1(5980,2035) 6080,2035 v1(6125,1990)
SCK_SD: U1.26 U6.5 | length 573.1
  Top Layer w6: U1.26 6435.13,2231.64 6458.18,2231.64 6466.91,2222.91 6466.91,2213.09 6527,2153 6527,1788.51 6530.51,1785 6564.17,1785 U6.5
  Top Layer w10: U6.5@6584.76,1763.62 6600.07,1763.62 6601.88,1765.43 U6.5@6602.75,1765.43
SD_CS: U1.4 U6.2 | length 1421.1
  Top Layer w6: v1@5890,2431.06 5891.06,2430 v1(5900,2430) 5910,2430 5965.79,2374.21 U1.4 ; v1(6405,2035) 6405,1755 6515,1645 U6.2
  Bottom Layer w6: v1(5900,2430) ccw(c5900,2426.3) 5897.38,2423.68 6286.06,2035 v1(6405,2035)
SDI: J4.4 U1.13 U7.5 | length 4497.5
  Top Layer w6: U7.5@5080,1575 5005,1575 4969.32,1610.68 5071.82,1713.18 cw(c5110,1675) 5079.69,1719.69 5210,1850 5860,1850 6000,1990 ; U1.13 6156.73,2146.73 6000,1990 ; J4.4 6210,4310 6210,4115 6325,4000 6325,3520 5980,3175 5980,2793.02 5965,2778.02 5833.02,2778.02 5785,2730 5785,2410 5731.01,2356.01 5731.01,2178.99 5920,1990 6000,1990
  Top Layer w10: U7.5@5080,1575 5104.53,1575 U7.5
SWCLK: P1.4 U1.45 | length 424.2
  Top Layer w6: P1.4 6275,2810 6275,2730 6215.79,2670.79 U1.45
SWDIO: P1.2 U1.46 | length 284.2
  Top Layer w6: P1.2 6195,2491.46 U1.46
  Top Layer w10: P1.2@6185,2750 P1.2
THERMO_CS: U1.3 U5.4 | length 1540.1
  Top Layer w6: v1(5965,2450) 6021.1,2393.9 U1.3
  Bottom Layer w6: v1(5965,2450) 5955,2450 5920,2485 5870,2485 5615,2230 5615,2085 6115,1585 U5.4
TMISO: U1.23 U5.3 | length 748.6
  Top Layer w6: U5.3 6351,1661 6351,1689.2 6351,2000.8 6351,2157.06 U1.23
TMOSI: U1.7
TSCK: U1.8 U5.5 | length 1347.4
  Top Layer w6: v1(5785,2220) 5925,2220 6005,2300 6095.12,2300 U1.8
  Bottom Layer w6: v1(5785,2220) 5630,2220 5630,2090 6035,1685 U5.5
TXB: J5.3 U1.9 | length 2476.1
  Top Layer w6: J5.3 4633.58,2885 5535,2885 5635,2785 5635,2121.57 5645.87,2110.7 5649,2110.7 5661,2110.7 v1(5664,2110.7) ; v1(5930,2170) 5965.99,2205.99 5965.99,2244.01 5997.76,2275.79 U1.9
  Bottom Layer w6: v1(5664,2110.7) 5870.7,2110.7 v1(5930,2170) v1@5920,2170
TXG: U1.47 U8.6 | length 945.9
  Top Layer w6: v1(6100,2620) 6125,2620 6176.42,2568.58 U1.47
  Bottom Layer w6: U8.6 5525,2545 6000,2545 6080,2625 6095,2610 6100,2615 v1(6100,2620)
USB_CON_N: *1.1 J2.2 | length 145.7
  Top Layer w10: *1.1 6767.6,1087.6 6785,1105 6785,1150 6791.61,1156.61 J2.2
  Top Layer w15: J2.2@6833.48,1156.4 J2.2
USB_CON_P: *1.3 J2.3 | length 99
  Top Layer w10: *1.3 6762.4,1162.4 6782.2,1182.2 J2.3
  Top Layer w15: J2.3@6833.48,1181.99 J2.3
USB_N: *1.6 U1.33 | length 1819.2
  Top Layer w10: v1(6365,1165) 6405,1125 6580,1125 6617.4,1087.6 *1.6 ; U1.33 6489.21,2374.21 v1@6552.5,2437.5
  Bottom Layer w10: v1(6365,1165) 6366.25,1166.25 6366.25,1861.25 6565,2060 6565,2425 v1(6555,2435)
USB_P: *1.4 U1.34 | length 1944.3
  Top Layer w10: v1(6425,1175) 6437.6,1162.4 *1.4 ; U1.34 6458.9,2393.9 6464,2399 6464.3,2399 6516,2450.7 6516,2451 v1(6620,2555)
  Bottom Layer w10: v1(6425,1175) 6620,1370 v1(6620,2555)
VBUS: *1.5 C1.1 C9.1 C12.1 C15.1 C16.2 C17.2 C18.2 C20.1 C21.2 C22.1 J2.1 J4.1 J5.8 Q1.1 U2.1 U3.3 U4.1 U5.0 U6.4 U7.0 U8.8 | length 12297.7
  Top Layer w6: J5.8 4080,2874.41 C22.1 4130,2797.56 4130,1810 4375,1810 U7.0 5272.44,1075 C21.2 6062.44,1072.44 U5.0 6222.44,1137.56 C16.2 6329.49,1137.56 v1@6367.05,1100 ; U8.8 5517.44,2630 C20.1 5590,2557.44 v1(5590,2045) 5660,2045 5719.01,2104.01 5719.01,2360.99 5773,2414.97 5773,2734.97 5828.05,2790.02 5900.02,2790.02 5925,2815 v1(5925,3205) 5925,3507.56 C18.2 6147.44,4547.44 J4.1 ; v1(6135,3150) 6202.44,3150 C15.1 6326.89,3152.56 U3.3 6379.45,3149.45 6400,3170 6400,3383.58 6414.44,3398.02 6414.44,3506.88 C9.1 ; v1(6370,1100) 6517.56,1100 C1.1 6695,1055 ; U6.4 6626.61,1731.61 v1(6725,1830) 6725,1997.44 C17.2 6716.61,2005.83 Q1.1@6716.61,2186.95 ; U2.1 6568.07,3550 C9.1 ; U4.1 6582.13,3735 C12.1 6457.56,3650 C9.1 ; *1.5 6656.77,1115 6700,1115 6700,1060 6695,1055 ; J2.1@6823.82,1131.02 J2.1 6838.98,1131.02 6870,1100 6870,1065 6828,1023 6732,1023 6700,1055 6695,1055
  Top Layer w10: v1@6367.05,1100 v1(6370,1100) ; U6.4 U6.4@6567.99,1730
  Bottom Layer w6: v1(5590,2045) 5590,1893.63 6136.82,1346.82 ccw(c6175,1385) 6144.69,1340.31 6151.42,1333.58 ccw(c6175,1285) 6175,1231 U5.0 ; v1(5925,3205) 6080,3205 v1(6135,3150) ; v1(6370,1100) 6415,1100 6725,1410 v1(6725,1830)
VCC: B2.1 C3.2 C5.2 C10.1 C11.1 C13.1 C14.1 P1.1 R2.2 U1.17 U1.36 U1.44 U2.8 U3.2 U4.8 | length 3890
  Top Layer w6: B2.1 5775.94,2356.15 5814,2394.2 5814,2724 5835,2745 5970,2745 6010,2785 6010,3165 6110,3265 C14.1@6207.56,3265 ; C10.1 6235.47,2073.03 U1.17 ; U1.44 6235.47,2613.03 C3.2 ; U3.2 6307.44,3262.56 C14.1 6210,3365 6355,3510 6355,3593.2 v1(6383.53,3621.73) 6383.53,3778.53 6390,3785 6682.44,3785 C13.1 6721.97,3714.53 U4.8 ; U1.36 6430.35,2562.91 C5.2 ; v1(6500,3605) 6500,3600 6520,3580 6682.56,3580 C11.1@6708.03,3554.53 ; U2.8 C11.1@6708.03,3554.53 ; C11.1 C11.1@6708.03,3554.53
  Top Layer w10: 6125.08,2962.5 6125.08,3020 6449.53,3020 R2.2 ; v1(6500,3605) v1@6510,3605
  Bottom Layer w6: v1(6383.53,3621.73) 6483.27,3621.73 v1(6500,3605)
  Bottom Layer w10: v1(6383.53,3621.73) 6383.53,3606.47 v1@6385,3605
VCELL: C19.2 F1.1 J3.1 | length 180.2
  Top Layer w6: C19.2 6862.56,2295 J3.1 F1.1
  Top Layer w10: C19.2@6853.19,2294.94 C19.2@6854.06,2294.07
VDDCORE: C8.1 U1.43 | length 99.7
  Top Layer w6: U1.43 6255.16,2536.28 6267.44,2548.57 C8.1
pads on no net: J2.4 J4.2 J4.6 J5.1 J5.4 J5.5 J5.7 J5.9 J5.10 J5.11 J5.12 J5.13 J5.14 J5.HOLE P1.6 P1.7 P1.8 U2.7 U3.4 U4.7 U5.1 U6.1 U6.8 U6.CD U6.SHIELD1 U6.SHIELD2 U6.SHIELD3 U7.1 U7.4 U8.1 U8.2 U8.3 U8.4 U8.9

## Polygon pours and split planes (outlines as drawn)
AGND on Bottom Layer "AGND_L02_P001" (solid, pour order 1): 2955,2670

## Keep-outs
Keep-Out Layer:
  region: 6160,4940 6160,3880 6965,3880 6965,4940
  region: 4155,2845 4155,1840 5500,1840 5500,2845
  rectangle: 4460,1025 5210,1725
  region: 6235,1035 6235,1835 5330,1835 5330,1035

## Silkscreen, mask and mechanical layers (free items; w line width, h text height)
Top Overlay:
  text "B" at 3135,2315.36 h150
  text "G" at 4115.04,1755.18 h40
  text "C" at 3135,1617.6 h250
  text "J" at 3135,1490 h200
  text "Cycloon Rev 1.0" at 3145,1376.66 h80
  text "H. Chinchinian, B. Jing," at 3145,1288.33 h40
  text "S. Marler, J. Tang" at 3145,1213.33 h40
  text "'.Print_Date'" at 3145,1130 h40
  text "H" at 3529.45,1086.25 h20
  text "Made with    in Stanford, CA" at 3145,1048.33 h40

## Text inside footprints (layer, text, board x,y; h text height)
J2: Mechanical 1 "Board Edge" at 7048.27,1083.78 h39.37 r90